# Altium PCB PCB_2021-02-11_09-37-49_2021-02-11.pcbdoc
Units mil, origin at the board's own origin, x right, y up, seen from the top; angles counter-clockwise.
Board outline 3125 x 2970 mil, 2 copper layers (Top Layer, Bottom Layer); 9 components, 32 nets, 46 pads, 0 vias.
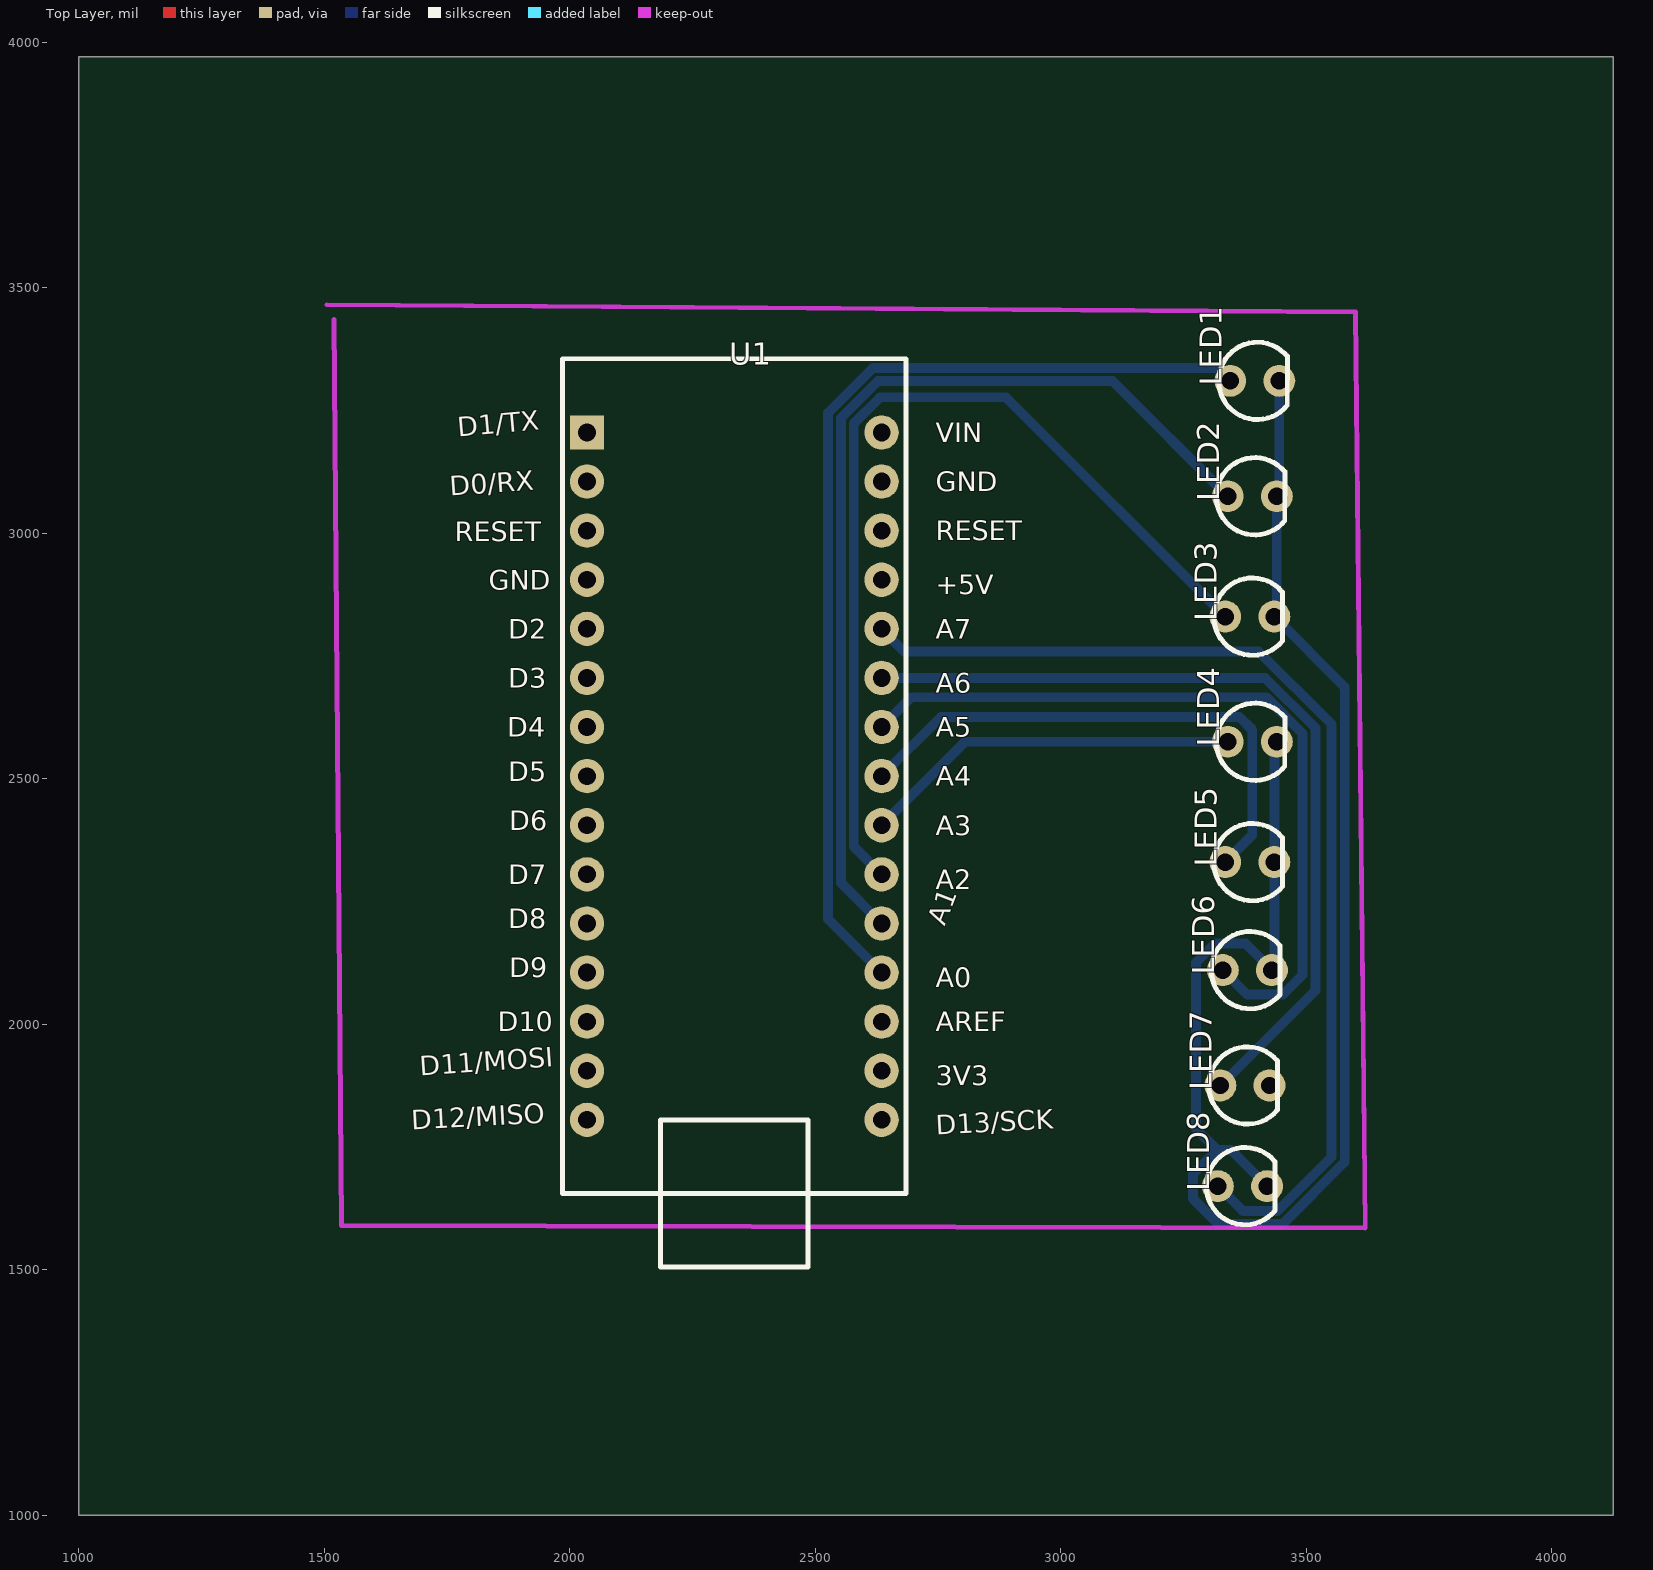
[diagram p0: Top Layer view]
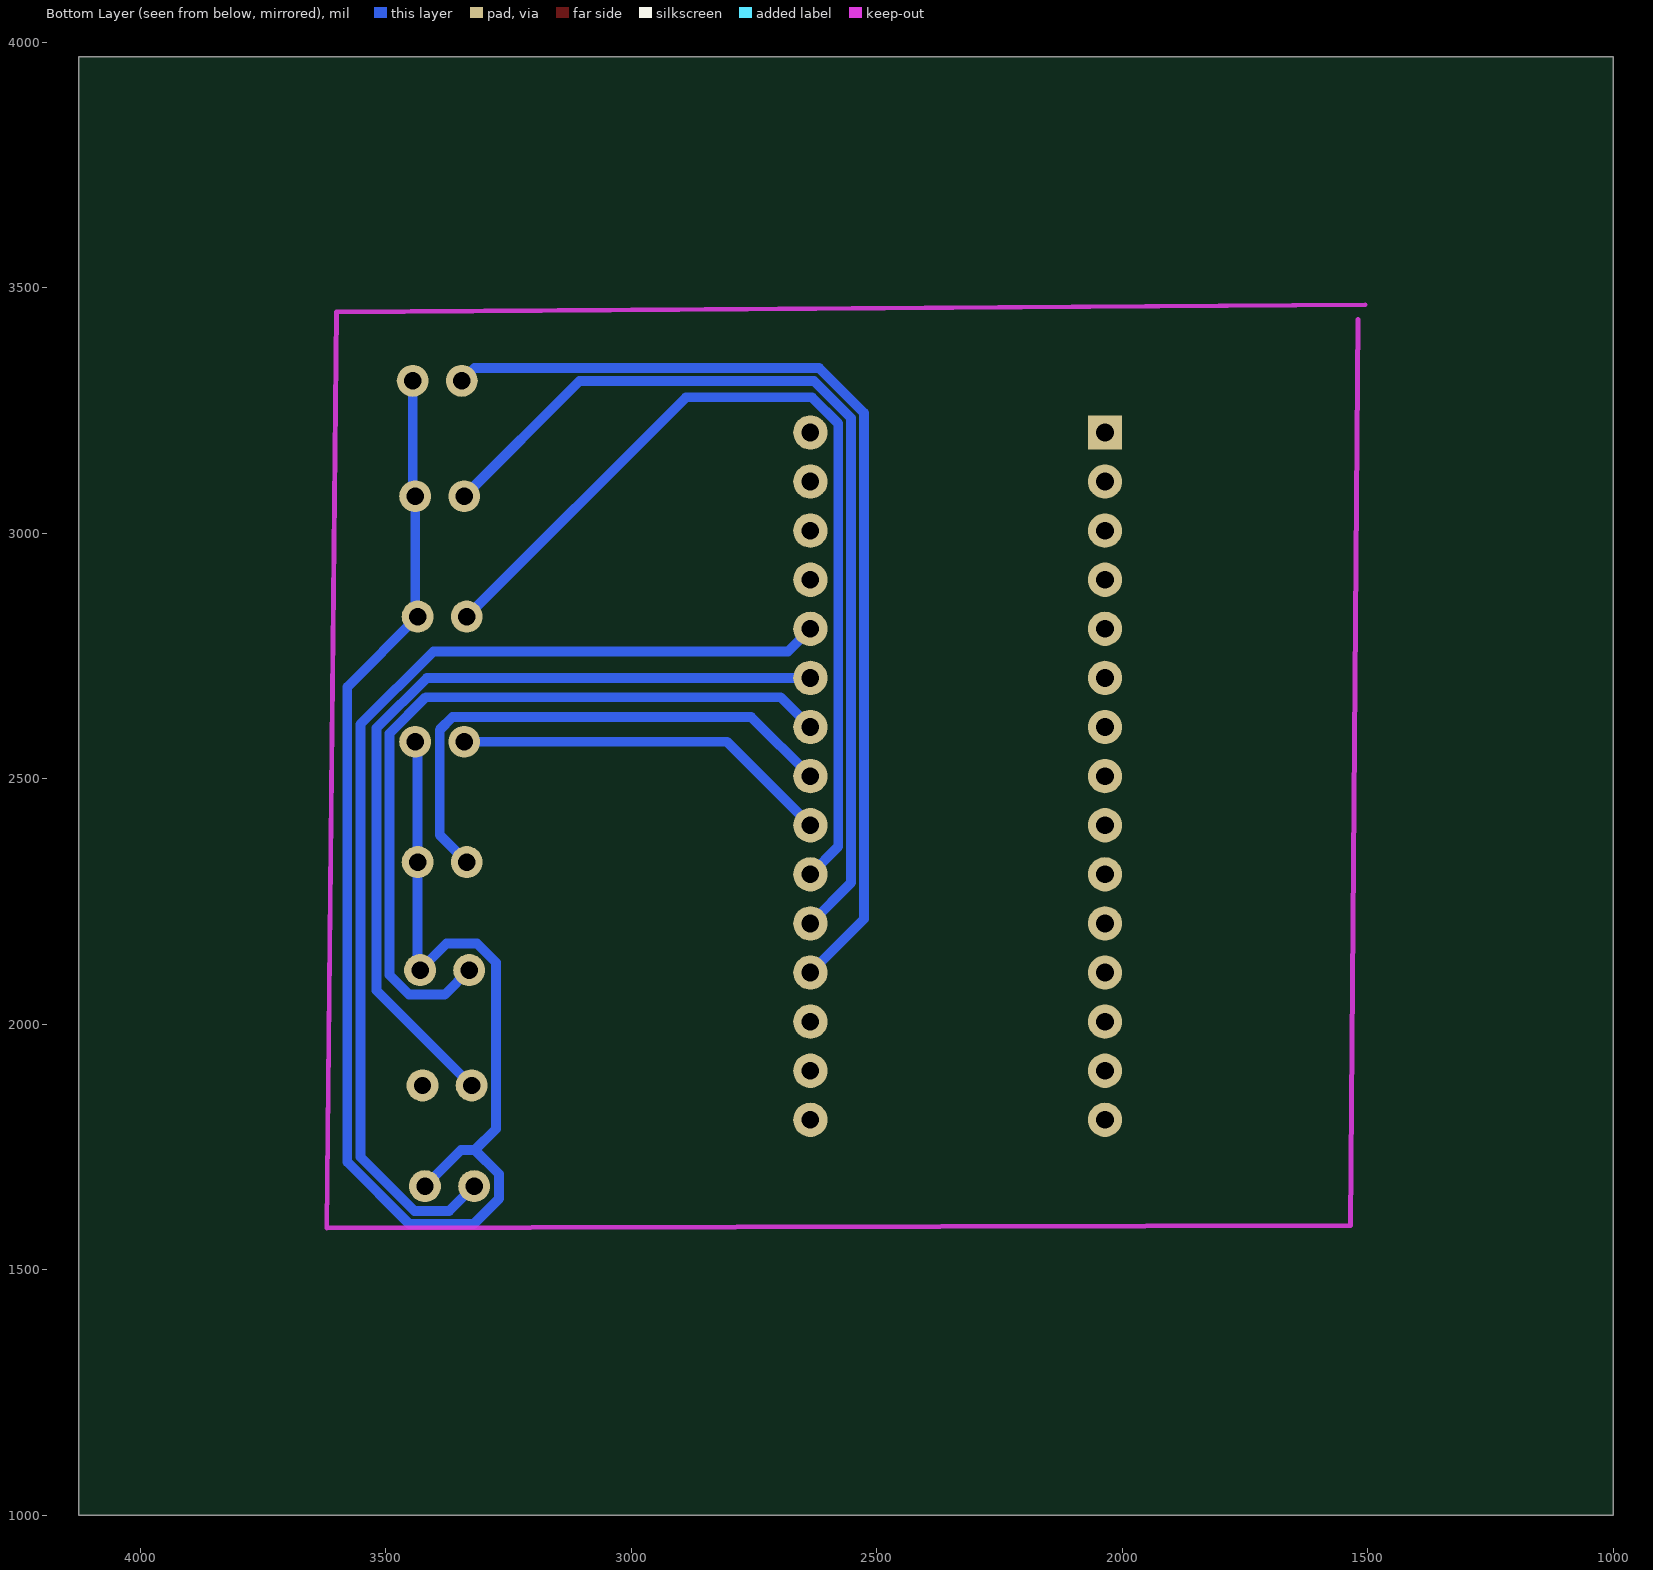
[diagram p1: Bottom Layer view, seen from below]

## Layer stack, top to bottom
Top Layer: signal copper (thickness not stored)
Dielectric: dielectric 12.6, FR-4, Dk 4.8
Bottom Layer: signal copper (thickness not stored)

## Board outline
4125,1000 1000,1000 1000,3970 4125,3970

## Components (designator, comment, footprint, x,y, rotation, side; value= is the part's Value field where it differs from the comment)
LED1 "LED-TH-3mm_G" LED-TH_BD3.0_GREEN 3395,3310 r90 top
LED2 "LED-TH-3mm_G" LED-TH_BD3.0_GREEN 3390,3075 r90 top
LED3 "LED-TH-3mm_G" LED-TH_BD3.0_GREEN 3385,2830 r90 top
LED4 "LED-TH-3mm_G" LED-TH_BD3.0_GREEN 3390,2575 r90 top
LED5 "LED-TH-3mm_G" LED-TH_BD3.0_GREEN 3385,2330 r90 top
LED6 "LED-TH-3mm_G" LED-TH_BD3.0_GREEN 3380,2110 r90 top
LED7 "LED-TH-3mm_G" LED-TH_BD3.0_GREEN 3375,1875 r90 top
LED8 "LED-TH-3mm_G" LED-TH_BD3.0_GREEN 3370,1670 r90 top
U1 "ARDUINO_NANO" ARDUINO_NANO 2335,2505 r0 top

## Footprints (in the part's own frame and the unit in brackets; to place one, negate y for a bottom-side part, rotate by r counter-clockwise, add the part's x,y. Pads: shape width x height; smd on the part's side, far side on the other; paste and mask are expansions set on the pad)
ARDUINO_NANO [mil]
  rect 70x70 hole 36: 1(-300,700)
  round 70 hole 36: 2(-300,600) 3(-300,500) 4(-300,400) 5(-300,300) 6(-300,200) 7(-300,100) 8(-300,0) 9(-300,-100) 10(-300,-200) 11(-300,-300) 12(-300,-400) 13(-300,-500) 14(-300,-600) 15(-300,-700) 16(300,-700) 17(300,-600) 18(300,-500) 19(300,-400) 20(300,-300) 21(300,-200) 22(300,-100) 23(300,0) 24(300,100) 25(300,200) 26(300,300) 27(300,400) 28(300,500) 29(300,600) 30(300,700)
  silkscreen extent -350,-1000 350,850
LED-TH_BD3.0_GREEN [mil]
  round 65 hole 35.43: 1(0,50) 2(0,-50)
  silkscreen extent -79,-66 79,73

## Nets (pads, with @x,y where several pads share a name; then routed paths per layer and width w, separated by ;. In a path a pad name is that pad's centre, name@x,y a point inside that pad or via, vN(x,y) a via of type N, cw(c..) or ccw(c..) an arc to the next point about the centre after c; other vN are vias at no path point)
GND: LED1.2 LED2.2 LED3.2 LED4.2 LED5.2 LED6.2 LED8.2 | length 3349.4
  Bottom Layer w20: LED8.2 3346.5,1743.5 3318.6,1743.5 ; LED4.2 3435,2570 LED5.2 3435,2115 LED6.2 3376.2,2163.8 3313.8,2163.8 3275.6,2125.5 3275.6,1786.5 3318.6,1743.5 ; LED1.2 3445,3080 LED2.2 3440,2835 LED3.2 3578.2,2686.8 3578.2,1719.2 3452.1,1593.1 3320.7,1593.1 3269.5,1644.2 3269.5,1694.5 3318.6,1743.5
LED7_2: LED7.2
U1_1: U1.1
U1_2: U1.2
U1_3: U1.3
U1_4: U1.4
U1_5: U1.5
U1_6: U1.6
U1_7: U1.7
U1_8: U1.8
U1_9: U1.9
U1_10: U1.10
U1_11: U1.11
U1_12: U1.12
U1_13: U1.13
U1_14: U1.14
U1_15: U1.15
U1_16: U1.16
U1_17: U1.17
U1_18: U1.18
U1_19: LED1.1 U1.19 | length 2052.7
  Bottom Layer w20: U1.19 2526,2214 2526,3245 2617.1,3336.1 3318.9,3336.1 LED1.1
U1_20: LED2.1 U1.20 | length 1980.2
  Bottom Layer w20: U1.20 2552.1,2287.9 2552.1,3234.2 2627.9,3310 3105,3310 LED2.1
U1_21: LED3.1 U1.21 | length 1905.5
  Bottom Layer w20: U1.21 2578.3,2361.7 2578.3,3223.4 2631.4,3276.5 2888.5,3276.5 LED3.1
U1_22: LED4.1 U1.22 | length 775.4
  Bottom Layer w20: U1.22 2805,2575 LED4.1
U1_23: LED5.1 U1.23 | length 1108
  Bottom Layer w20: U1.23 2755.6,2625.6 3363.8,2625.6 3390,2599.4 3390,2385 LED5.1
U1_24: LED6.1 U1.24 | length 1604.4
  Bottom Layer w20: U1.24 2695.8,2665.8 3418.5,2665.8 3492.3,2592 3492.3,2099.9 3452.8,2060.4 3379.6,2060.4 LED6.1
U1_25: LED7.1 U1.25 | length 1733.8
  Bottom Layer w20: U1.25 3416.3,2705 3518.5,2602.8 3518.5,2068.4 LED7.1
U1_26: LED8.1 U1.26 | length 2176
  Bottom Layer w20: U1.26 2680.9,2759.1 3402.9,2759.1 3551.2,2610.8 3551.2,1729.1 3441.3,1619.3 3370.7,1619.3 LED8.1
U1_27: U1.27
U1_28: U1.28
U1_29: U1.29
U1_30: U1.30

## Silkscreen, mask and mechanical layers (free items; w line width, h text height)
Document:
  lines w0.1: 2561.5,2484 2563.5,2486

## Text inside footprints (layer, text, board x,y; h text height)
U1: Top Overlay "D1/TX" at 1773.04,3195.98 h40 r5; Top Overlay "GND" at 2745,3085 h40; Top Overlay "+5V" at 2745,2875 h40; Top Overlay "D12/MISO" at 1678.15,1785.03 h40 r3; Top Overlay "VIN" at 2745,3185 h40; Top Overlay "D13/SCK" at 2746.05,1775.03 h40 r3; Top Overlay "GND" at 1835.3,2885 h40; Top Overlay "D0/RX" at 1756.4,3075.95 h40 r4; Top Overlay "RESET" at 1765.9,2983.2 h40; Top Overlay "D2" at 1874.6,2785 h40; Top Overlay "D3" at 1874.6,2685 h40; Top Overlay "D4" at 1872.8,2585 h40; Top Overlay "D5" at 1874.6,2495 h40; Top Overlay "D6" at 1876.4,2395 h40; Top Overlay "D7" at 1874.6,2285 h40; Top Overlay "D8" at 1874.6,2195 h40; Top Overlay "D9" at 1876.4,2095 h40; Top Overlay "D10" at 1853.5,1985 h40; Top Overlay "D11/MOSI" at 1694.9,1895.05 h40 r4; Top Overlay "3V3" at 2745,1875 h40; Top Overlay "AREF" at 2745,1985 h40; Top Overlay "A0" at 2745,2075 h40; Top Overlay "A1" at 2763.67,2197.83 h40 r69; Top Overlay "A2" at 2745,2275 h40; Top Overlay "A3" at 2745,2385 h40; Top Overlay "A4" at 2745,2485 h40; Top Overlay "A5" at 2745,2585 h40; Top Overlay "A6" at 2745,2675 h40; Top Overlay "A7" at 2745,2785 h40; Top Overlay "RESET" at 2745,2985 h40